# Altium PCB ИТКС.687281.099.PcbDoc
Units mm, origin at the board's own origin, x right, y up, seen from the top; angles counter-clockwise.
Board outline 107.3 x 127.2 mm, 2 copper layers (Top Layer, Bottom Layer); 70 components, 63 nets, 341 pads, 55 vias.
Unrouted connection lines stored in the file: 13.
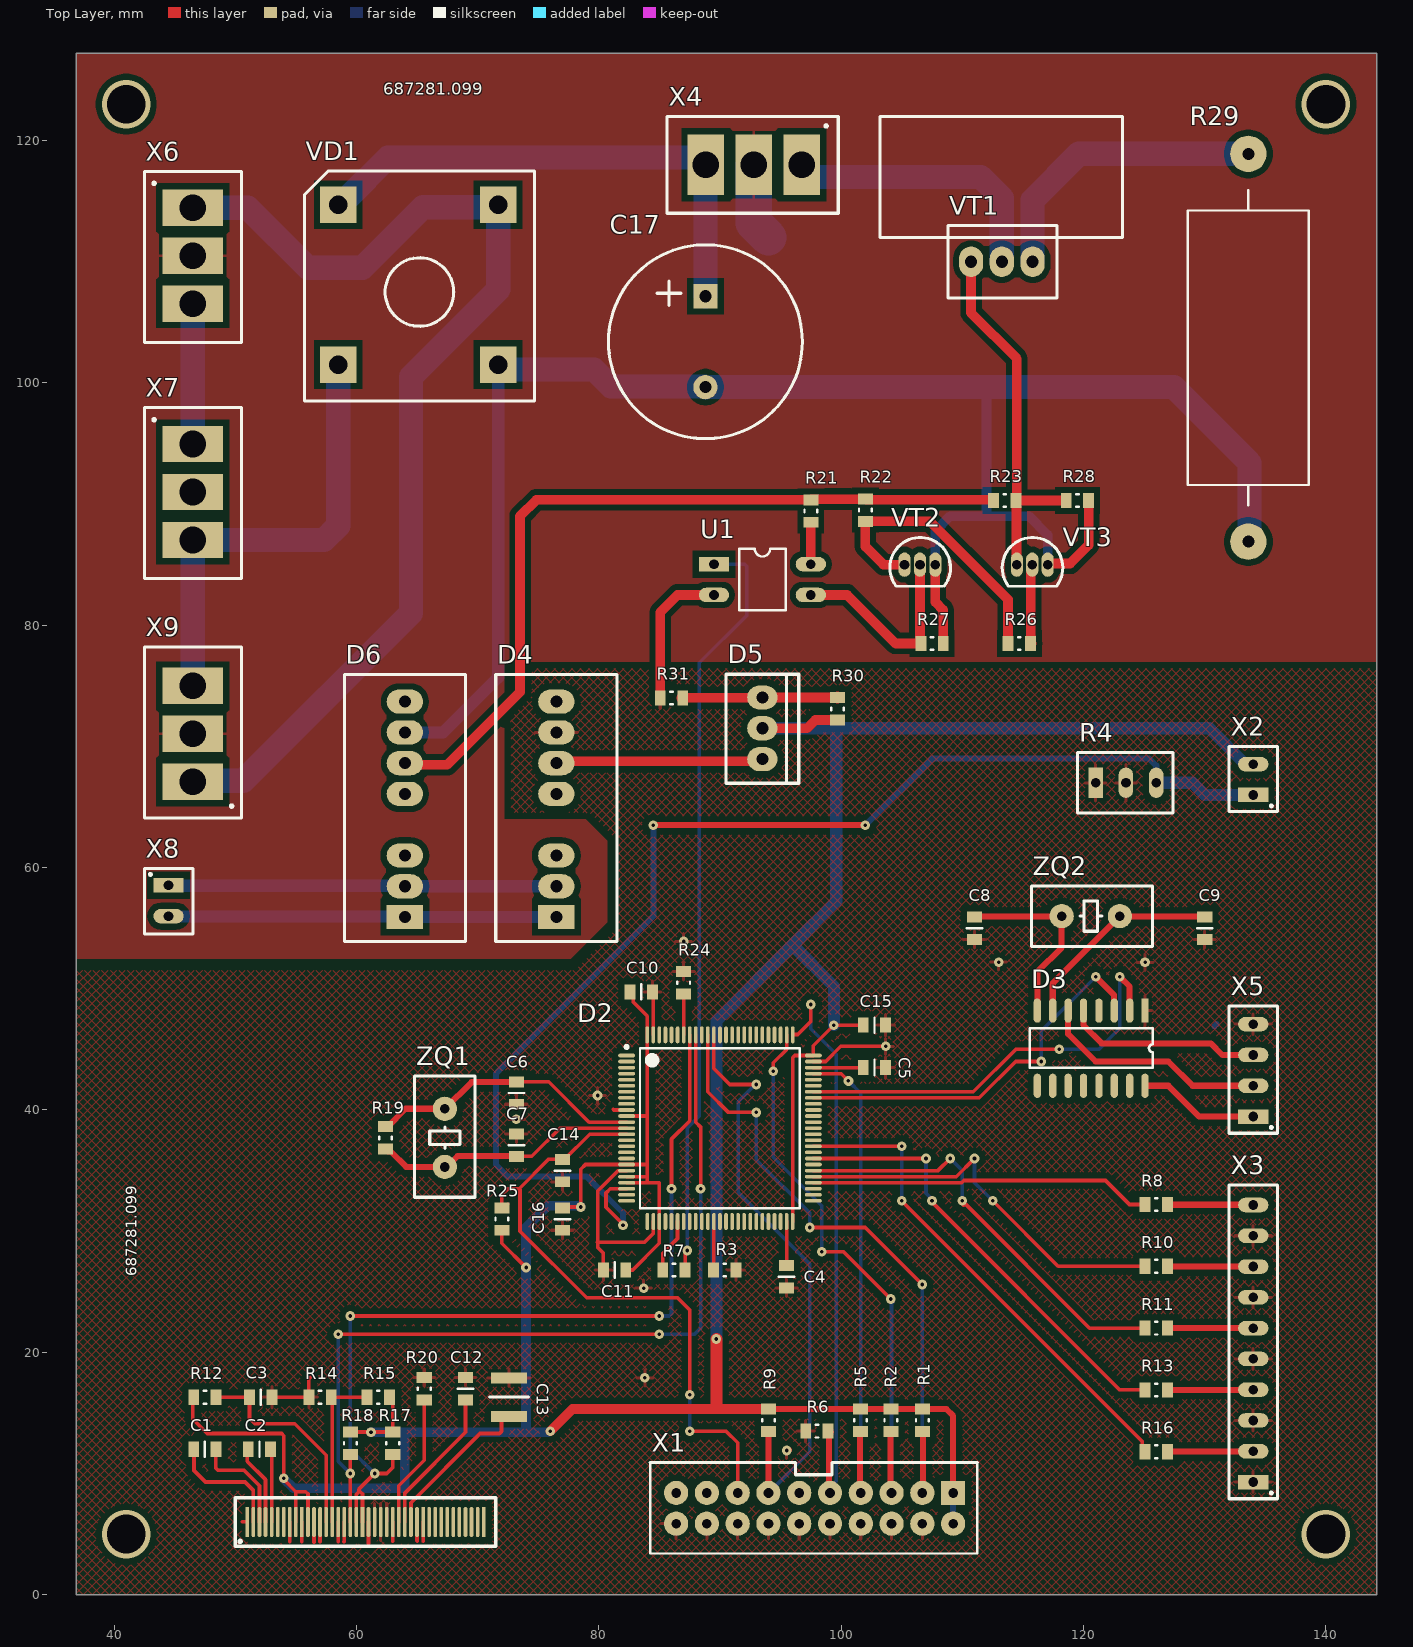
[diagram p0: Top Layer view]
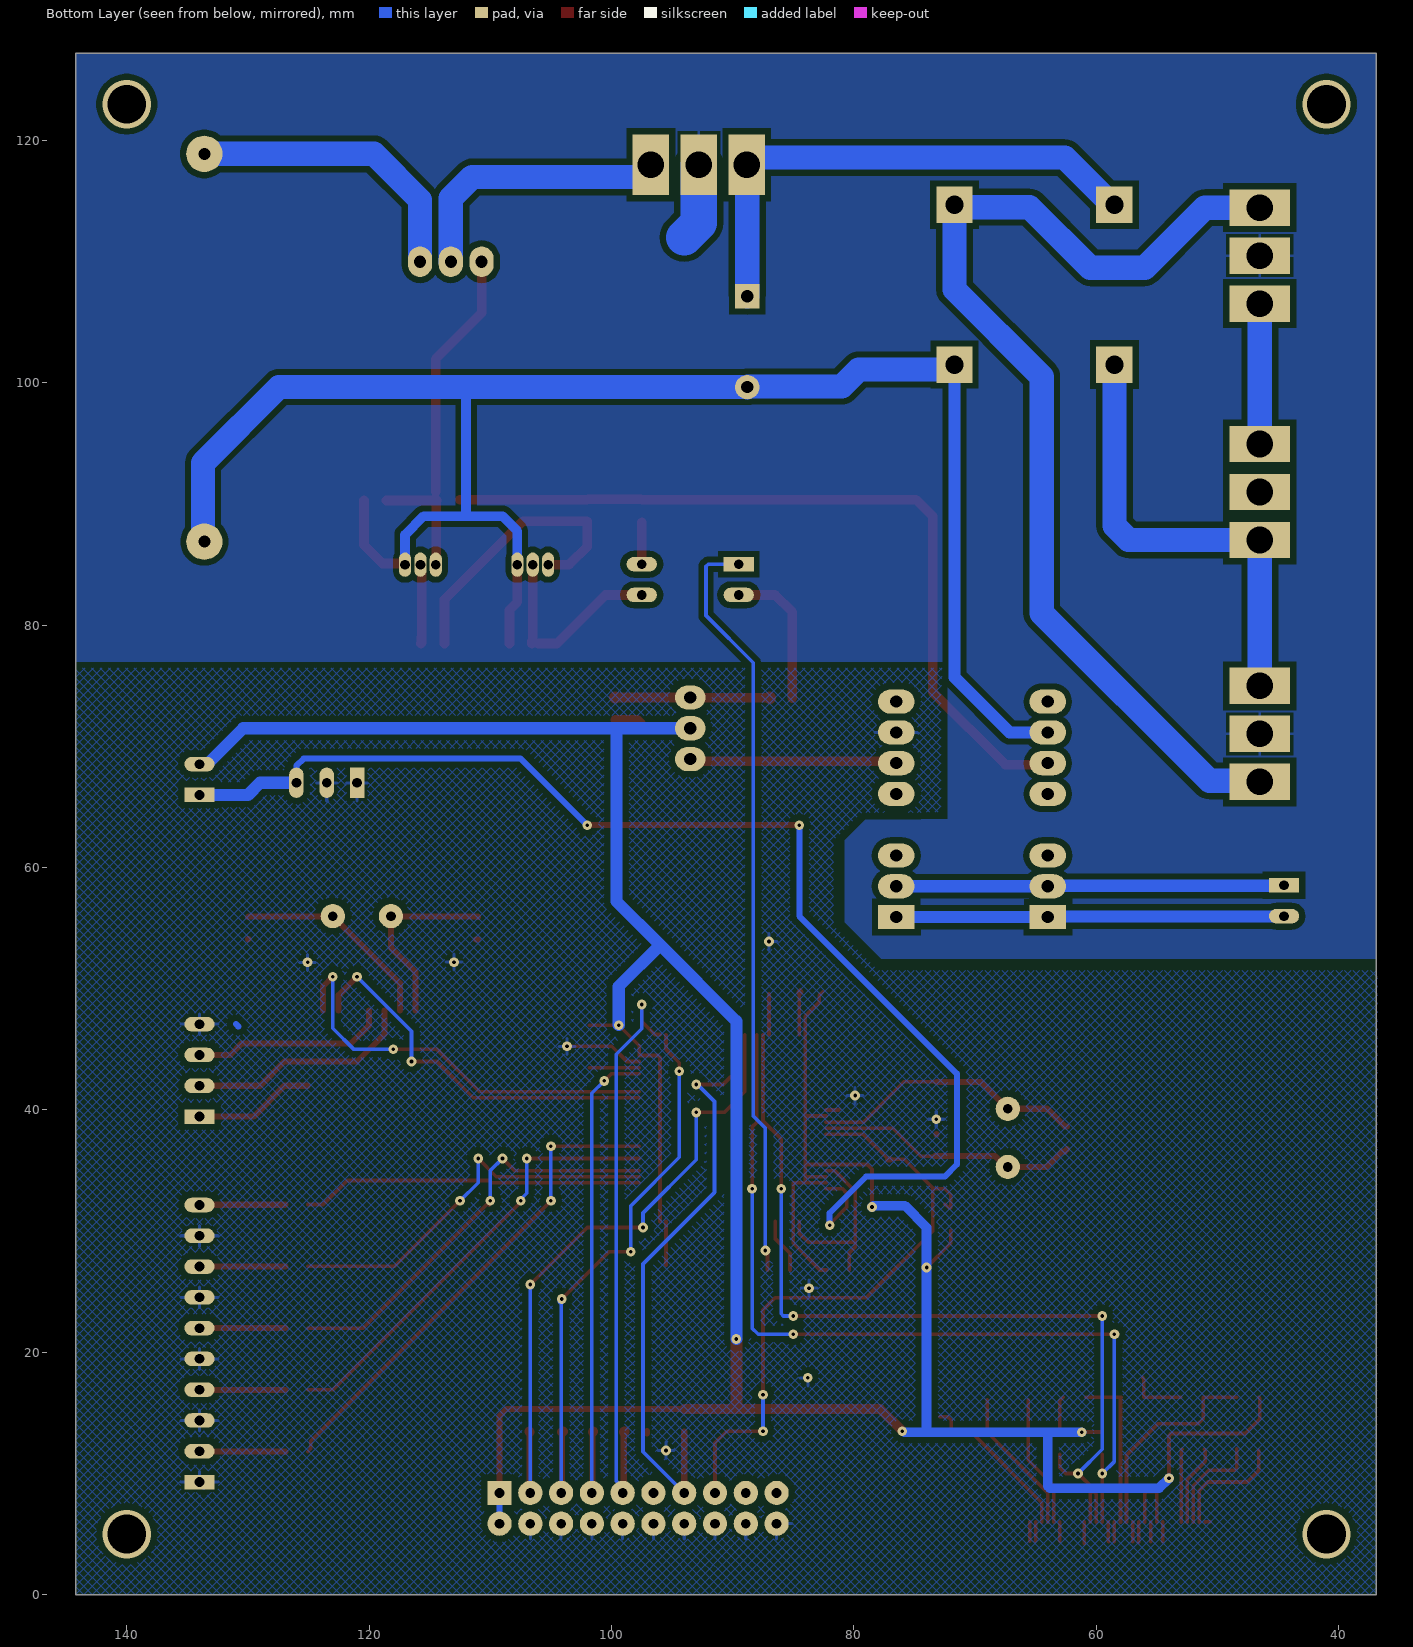
[diagram p1: Bottom Layer view, seen from below]

## Layer stack, top to bottom
Top Solder: solder mask 0.0102, Solder Resist, Dk 3.5
Top Layer: signal copper 0.0356
Dielectric 1: dielectric 0.32, FR-4, Dk 4.8
Bottom Layer: signal copper 0.0356
Bottom Solder: solder mask 0.0102, Solder Resist, Dk 3.5

## Board outline
36.9,0 36.9,127.2 144.2,127.2 144.2,0

## Design rules (kind name [scope] priority, off if disabled: settings)
Clearance [All] p1: gap=0.1 ignorepadtopadclearanceinfootprint=FALSE except(0.5: Arc-Fill Arc-Poly Arc-Region Track-Fill Track-Poly Track-Region SMDPad-Fill SMDPad-Poly SMDPad-Region THPad-Fill THPad-Poly THPad-Region Via-Fill Via-Poly Via-Region Fill-Fill Fill-Poly Fill-Region Poly-Poly Poly-Region Region-Region)
PolygonConnect [All] p1: connectstyle=Relief reliefconductorwidth=0.254 reliefentries=4 polygonreliefangle="90 Angle" airgapwidth=0.254
RoutingVias [All] p1: holewidth=0.711 width=1.27 viastyle="Through Hole" minholewidth=0.1 minwidth=0.1 maxholewidth=5 maxwidth=5
SolderMaskExpansion [All] p1: expansion=0.3 istentingtop=FALSE soldermaskfromhole=TRUE
Width [All] p1: maxlimit=3 minlimit=0.3 preferedwidth=0.5
30 further rules are at their usual default settings.

## Components (designator, comment, footprint, x,y, rotation, side; value= is the part's Value field where it differs from the comment)
C1 "0.1мкф" "C 0805" 47.5,12 r180 top
C2 "0.1мкф" "C 0805" 52,12 r180 top
C3 "0.1мкф" "C 0805" 52.1,16.3 r0 top
C4 "0.1мкф" "C 0805" 95.5,26.25 r270 top
C5 "0.1мкф" "C 0805" 102.75,43.5 r0 top
C6 "22пФ" "C 0805" 73.2,41.4 r90 top
C7 "22пФ" "C 0805" 73.2,37.1 r270 top
C8 "22пФ" "C 0805" 111,55 r270 top
C9 "22пФ" "C 0805" 130,55 r270 top
C10 "0.1мкф" "C 0805" 83.5,49.75 r0 top
C11 "0.1мкф" "C 0805" 81.3,26.8 r180 top
C12 "4.7мкф" "C 0805" 69,17 r270 top
C13 "2.2мкф" "C 1210" 72.588,17.9 r270 top
C14 "0.1мкф" "C 0805" 77,35 r270 top
C15 "0.1мкф" "C 0805" 102.75,47 r180 top
C16 "0.1мкф" "C 0805" 77,31 r90 top
C17 "100мкф" KSE-100 88.8,103.4 r270 top (schematic designator C1)
D1 "SSD1306 OLED" 50A-40BX 51,6 r0 top
D2 "0" "LQFP - 100" 90,38.5 r0 top
D3 "CH340G" SO16 125.08,48.2 r270 top
D4 "TMR 3-2423WI" "TMR 3WI Series" 76.5,55.92 r180 top
D5 "LM317" TO-220 93.5,68.96 r180 top
D6 "TMR 3-2423WI" "TMR 3WI Series" 64,55.92 r180 top
R1 "10к" "R 0805" 106.7,14.4 r270 top
R2 "10к" "R 0805" 104.1,14.4 r270 top
R3 "10к" "R 0805" 90.4,26.8 r0 top
R4 "20к" JBR-3266W 121,67 r90 top
R5 "10к" "R 0805" 101.6,14.4 r270 top
R6 "10к" "R 0805" 98,13.5 r0 top
R7 "360" "R 0805" 86.2,26.8 r0 top
R8 "10" "R 0805" 126,32.2 r0 top
R9 "10к" "R 0805" 94,14.4 r270 top
R10 "10" "R 0805" 126,27.1 r0 top
R11 "10" "R 0805" 126,22 r0 top
R12 "4.7к" "R 0805" 47.5,16.3 r180 top
R13 "10" "R 0805" 126,16.9 r0 top
R14 "100" "R 0805" 57,16.3 r0 top
R15 "10" "R 0805" 61.8,16.3 r0 top
R16 "10" "R 0805" 126,11.8 r0 top
R17 "4.7к" "R 0805" 63,12.5 r270 top
R18 "4.7к" "R 0805" 59.5,12.5 r270 top
R19 "1М" "R 0805" 62.4,37.7 r90 top
R20 "430к" "R 0805" 65.6,17 r270 top
R21 "36к" "R 0805" 97.5,89.425 r90 top
R22 "14к" "R 0805" 102,89.5 r90 top
R23 "14к" "R 0805" 113.5,90.3 r180 top
R24 "10к" "R 0805" 87,50.5 r270 top
R25 "10к" "R 0805" 72,31 r90 top
R26 "20к" "R 0805" 114.7,78.5 r180 top
R27 "20к" "R 0805" 107.5,78.5 r180 top
R28 "14к" "R 0805" 119.5,90.3 r180 top
R29 "1.2" RX27-1 133.6,86.9 r90 top
R30 "100" "R 0805" 99.7,73.1 r270 top
R31 "150" "R 0805" 86,74 r0 top
U1 "SFH618A-4X" DIP4 89.5,85.04 r0 top
VD1 "0" BR-10 71.7,101.5 r180 top
VT1 "2SK3569" TO-220 115.8,110 r270 top
VT2 "BC548A" TO-92 107.77,85 r270 top
VT3 "BC548A" TO-92 117.04,85 r270 top
X1 "JTAG/SWD" "BH-20R (DS1013-20R) (IDC-20MR)" 109.24,8.4 r270 top
X2 "B57045-K 103-K" PLS-2 134,66 r180 top
X3 "Кнопки" PLS-10 134,9.3 r180 top
X4 "Термо-нагрузка" 1-1123723-3 173.245,121.947 r270 top
X5 "USB" PLS-4 134,39.46 r180 top
X6 "Сеть 220В" 1-1123723-3 42.553,190.945 r0 top
X7 "Макс 2А" 1-1123723-3 42.553,171.445 r0 top
X8 "AC/DC: B2L050ESB" PLS-2 44.5,58.54 r0 top
X9 "AC/DC: B2L050ESB" 1-1123723-3 50.447,-9.405 r180 top
ZQ1 "8.000Мгц" HC-49S 67.3,35.3 r90 top
ZQ2 "12.000Мгц" HC-49S 118.2,56 r0 top

## Footprints (in the part's own frame and the unit in brackets; to place one, negate y for a bottom-side part, rotate by r counter-clockwise, add the part's x,y. Pads: shape width x height; smd on the part's side, far side on the other; paste and mask are expansions set on the pad)
1-1123723-3 [mm]
  rect 5x3 hole 2.2: 1(3.947,-76.485) 2(3.947,-80.445) 3(3.947,-84.405)
  silkscreen extent -0.05,-87.6 7.95,-73.49
50A-40BX [mm] "X"
  rect 0.3x2.5 smd: 1(0,0) 10(4.5,0) 20(9.5,0) 30(14.5,0) 40(19.5,0)
  oval 0.3x2.5 smd: 2(0.5,0) 3(1,0) 4(1.5,0) 5(2,0) 6(2.5,0) 7(3,0) 8(3.5,0) 9(4,0) 11(5,0) 12(5.5,0) 13(6,0) 14(6.5,0) 15(7,0) 16(7.5,0) 17(8,0) 18(8.5,0) 19(9,0) 21(10,0) 22(10.5,0) 23(11,0) 24(11.5,0) 25(12,0) 26(12.5,0) 27(13,0) 28(13.5,0) 29(14,0) 31(15,0) 32(15.5,0) 33(16,0) 34(16.5,0) 35(17,0) 36(17.5,0) 37(18,0) 38(18.5,0) 39(19,0)
  silkscreen extent -1,-2 20.5,2
"BH-20R (DS1013-20R) (IDC-20MR)" [mm] "X"
  rect 2x2 hole 0.8: 1(0,0)
  round 2 hole 0.8: 2(2.54,0) 3(0,-2.54) 4(2.54,-2.54) 5(0,-5.08) 6(2.54,-5.08) 7(0,-7.62) 8(2.54,-7.62) 9(0,-10.16) 10(2.54,-10.16) 11(0,-12.7) 12(2.54,-12.7) 13(0,-15.24) 14(2.54,-15.24) 15(0,-17.78) 16(2.54,-17.78) 17(0,-20.32) 18(2.54,-20.32) 19(0,-22.86) 20(2.54,-22.86)
  silkscreen extent -2.5,-25 5,2
BR-10 [mm]
  rect 3x3 hole 1.5: AC1(0,-13.2) AC2(13.2,0) U+(13.2,-13.2) U-(0,0)
  silkscreen extent -3,-16 16,3
"C 0805" [mm] "C"
  rect 0.9x1.25 smd: 1(-0.925,0) 2(0.925,0)
  silkscreen extent 0,-0.64 0,0.64
"C 1210" [mm] "C"
  rect 0.9x3 smd: 1(0,0) 2(3.2,0)
  silkscreen extent 1.6,-1.6 1.6,1.6
DIP4 [mm]
  rect 2.5x1.2 hole 0.8: 1(0,0)
  oval 2.5x1.2 hole 0.8: 2(0,-2.54) 3(8,-2.54) 4(8,0)
  silkscreen extent 2.08,-3.81 5.91,1.27
HC-49S [mm] "BQ"
  round 2 hole 0.8: 1(0,0) 2(4.8,0)
  silkscreen extent -2.5,-2.5 7.5,2.5
JBR-3266W [mm]
  rect 2.5x1.2 hole 0.8: 1(0,0)
  oval 2.5x1.2 hole 0.8: 2(0,-5) 3(0,-2.5)
  silkscreen extent -2.5,-6.4 2.5,1.5
KSE-100 [mm]
  rect 2x2 hole 1: 1(-3.75,0)
  round 2 hole 1: 2(3.75,0)
  silkscreen extent -8,-8 8,8
"LQFP - 100" [mm] "LQFP - 100"
  oval 1.4x0.3 smd: 1(-7.7,6) 2(-7.7,5.5) 3(-7.7,5) 4(-7.7,4.5) 5(-7.7,4) 6(-7.7,3.5) 7(-7.7,3) 8(-7.7,2.5) 9(-7.7,2) 10(-7.7,1.5) 11(-7.7,1) 12(-7.7,0.5) 13(-7.7,0) 14(-7.7,-0.5) 15(-7.7,-1) 16(-7.7,-1.5) 17(-7.7,-2) 18(-7.7,-2.5) 19(-7.7,-3) 20(-7.7,-3.5) 21(-7.7,-4) 22(-7.7,-4.5) 23(-7.7,-5) 24(-7.7,-5.5) 25(-7.7,-6) 51(7.7,-6) 52(7.7,-5.5) 53(7.7,-5) 54(7.7,-4.5) 55(7.7,-4) 56(7.7,-3.5) 57(7.7,-3) 58(7.7,-2.5) 59(7.7,-2) 60(7.7,-1.5) 61(7.7,-1) 62(7.7,-0.5) 63(7.7,0) 64(7.7,0.5) 65(7.7,1) 66(7.7,1.5) 67(7.7,2) 68(7.7,2.5) 69(7.7,3) 70(7.7,3.5) 71(7.7,4) 72(7.7,4.5) 73(7.7,5) 74(7.7,5.5) 75(7.7,6)
  oval 0.3x1.4 smd: 26(-6,-7.7) 27(-5.5,-7.7) 28(-5,-7.7) 29(-4.5,-7.7) 30(-4,-7.7) 31(-3.5,-7.7) 32(-3,-7.7) 33(-2.5,-7.7) 34(-2,-7.7) 35(-1.5,-7.7) 36(-1,-7.7) 37(-0.5,-7.7) 38(0,-7.7) 39(0.5,-7.7) 40(1,-7.7) 41(1.5,-7.7) 42(2,-7.7) 43(2.5,-7.7) 44(3,-7.7) 45(3.5,-7.7) 46(4,-7.7) 47(4.5,-7.7) 48(5,-7.7) 49(5.5,-7.7) 50(6,-7.7) 76(6,7.7) 77(5.5,7.7) 78(5,7.7) 79(4.5,7.7) 80(4,7.7) 81(3.5,7.7) 82(3,7.7) 83(2.5,7.7) 84(2,7.7) 85(1.5,7.7) 86(1,7.7) 87(0.5,7.7) 88(0,7.7) 89(-0.5,7.7) 90(-1,7.7) 91(-1.5,7.7) 92(-2,7.7) 93(-2.5,7.7) 94(-3,7.7) 95(-3.5,7.7) 96(-4,7.7) 97(-4.5,7.7) 98(-5,7.7) 99(-5.5,7.7) 100(-6,7.7)
  silkscreen extent -7.82,-6.6 6.6,6.82
PLS-2 [mm] "X"
  rect 2.5x1.2 hole 0.8: 1(0,0)
  oval 2.5x1.2 hole 0.8: 2(0,-2.54)
  silkscreen extent -2,-4 2,1.38
PLS-4 [mm] "X"
  rect 2.5x1.2 hole 0.8: 1(0,0)
  oval 2.5x1.2 hole 0.8: 2(0,-2.54) 3(0,-5.08) 4(0,-7.62)
  silkscreen extent -2,-9.12 2,1.38
PLS-10 [mm] "X"
  rect 2.5x1.2 hole 0.8: 1(0,0)
  oval 2.5x1.2 hole 0.8: 2(0,-2.54) 3(0,-5.08) 4(0,-7.62) 5(0,-10.16) 6(0,-12.7) 7(0,-15.24) 8(0,-17.78) 9(0,-20.32) 10(0,-22.86)
  silkscreen extent -2,-24.5 2,1.38
"R 0805" [mm] "R"
  rect 0.9x1.25 smd: 1(-0.925,0) 2(0.925,0)
  silkscreen extent -0.1,-0.53 0.1,0.53
RX27-1 [mm]
  round 3 hole 1: 1(0,0) 2(32,0)
  silkscreen extent 3,-5 29,5
SO16 [mm] "D"
  rect 2x0.6 smd: 1(0,0)
  oval 2x0.6 smd: 2(0,-1.27) 3(0,-2.54) 4(0,-3.81) 5(0,-5.08) 6(0,-6.35) 7(0,-7.62) 8(0,-8.89) 9(6.2,-8.89) 10(6.2,-7.62) 11(6.2,-6.35) 12(6.2,-5.08) 13(6.2,-3.81) 14(6.2,-2.54) 15(6.2,-1.27) 16(6.2,0)
  silkscreen extent 1.47,-9.53 4.73,0.64
"TMR 3WI Series" [mm] "D"
  rect 3x2 hole 1: 1(0,0)
  oval 3x2 hole 1: 2(0,-2.54) 3(0,-5.08) 5(0,-10.16) 6(0,-12.7) 7(0,-15.24) 8(0,-17.78)
  silkscreen extent -5,-20 5,2
TO-92 [mm] "VT"
  oval 2x1 hole 0.8: B(0,-1.27) E(0,0) K(0,-2.54)
  silkscreen extent -2.25,-3.75 1.78,1.25
TO-220 [mm]
  oval 2.5x2 hole 1: 1(0,-5.08) 2(0,-2.54) 3(0,0)
  silkscreen extent -3,-7 3,2

## Part data
C1 C2 C3 C4 C5 C10 C11 C14 C15 C16: library part "GRM21BR71H 104", "0.1 мкФ X7R 50В 10% 0805, GRM21BR71H104KA01L"
C6 C7 C8 C9: library part "GRM21A5C2E 220", "22пФ C0G 250B 5% 0805, GRM21A5C2E220J"
C12: library part "GRM21BR61A 475", "GRM21BR61A475KA73L, (чип 0805 X5R 4.7uF +10% 10V), Керамический ЧИП-конденсатор 0805 X5R 4.7мкФ +10%"
C13: library part "GRM32ER72A 225", "2.2 мкФ X7R 10% 100В 1210, GRM32ER72A225K"
C17: library part KSE-100UF-400V-1830-105, "Конденсатор электролитический KSE-100UF-400V-1830-105"
D2: library part STM32F407VE6, "STM32F407VE6, Cortex-M3, 512k"
D3: "CH340G, Преобразователь интерфейса USB в UART [SOP-16]"
D5: "LM317, Стабилизатор напряжения, линейный,регулируемый, 1,5А, TO220"
R1 R2 R3 R5 R6 R9 R24 R25: library part "RT0805BRD07 10K", "0.125Вт 0805 10 кОм, 0п.1%, RT0805BRD0710KL"
R4: library part "JBR-3266W 203", "JBR-3266W-203-R, 20 кОм, Резистор подстроечный"
R7: library part "RC0805FR-07 360R", "RC0805FR-07360RL, (чип 0805 360 1%), Толстопленочный ЧИП-резистор 0805 360Ом +1% 0.125Вт"
R8 R10 R11 R13 R15 R16: library part "RC0805FR-07 10R", "0.125Вт 0805 10 Ом, 1%, RC0805FR-0710RL"
R12 R17 R18: library part "RC0805FR07 4K7", "0.125Вт 0805 4.7 кОм, 1%, RC0805FR-074K7L"
R14 R30: library part "RC0805FR-07 100R", "0.125Вт 0805 100 Ом, 1%, RC0805FR-07100RL"
R19: library part "RC0805FR-07 1M", "0.125Вт 0805 1 МОм, 1%, RC0805FR-071ML"
R20: library part "RC0805JR-07 430K", "0.125Вт 0805 430 кОм, 5%, RC0805JR-07430KL"
R21: library part "RC0805FR-07 36K", "RC0805FR-0736KL, (чип 0805 36.0К 1%), Толстопленочный ЧИП-резистор 0805 36кОм"
R22 R23 R28: library part "RC0805FR-07 14K", "14 кОм 0805 1% RC0805FR-0714K"
R26 R27: library part "RC0805FR-07 20K", "0.125Вт 0805 20 кОм, 1%, RC0805FR-0720KL"
R29: library part "RX27-1 1.2R", "RX27-1 1.2 Ом 5W 5% / SQP5, Мощный постоянный резистор , керамо-цементный корпус"
R31: library part "RC0805FR-07 150R", "RC0805FR-07150RL, (чип 0805 150 1%), Толстопленочный ЧИП-резистор 0805 150Ом +1% 0.125Вт"
U1: "SFH618A-4X, Оптопара транзисторная [DIP-4]"
VD1: library part BR1001, "BR1001, Диодный мост однофазный 10А 100В [BR-10.] (=KBPC1001, BR101)"
VT1: "2SK3569, Транзистор, TT-MOSVI, N-канал, 600В, 10А"
VT2 VT3: "BC548A, Транзистор NPN 30В 0.1А"
X1: library part BH-20R, "BH-20R (DS1013-20R) (IDC-20MR), Вилка на плату угловая 20pin 2.54мм"
X2 X8: library part PLS-2, "PLS-2 (DS-1021-1x2), Вилка штыревая 2.54мм 1x2pin прямая тип1"
X3: library part PLS-10, "PLS-10(DS-1021-1x10), Вилка штыревая 2.54мм 1x10pin прямая тип1"
X4 X6 X7 X9: library part 1-1123723-3, "1-1123723-3 (B3P-VH), Разъем 3 pin шаг 3.96мм"
X5: library part PLS-4, "PLS-4 (DS-1021-1x4), Вилка штыревая 2.54мм 1x4pin прямая тип1"
ZQ1: library part "HC-49S 8M", "8.000Мгц, HC-49S, Кварцевый резонатор"
ZQ2: library part "HC-49S 12M", "12.000Мгц, HC-49S, Кварцевый резонатор"

## Via types
v1: diameter 0.8, hole 0.3, Top Layer to Bottom Layer, 51 vias
v2: diameter 4, hole 3.2, Top Layer to Bottom Layer, 4 vias

## Nets (pads, with @x,y where several pads share a name; then routed paths per layer and width w, separated by ;. In a path a pad name is that pad's centre, name@x,y a point inside that pad or via, vN(x,y) a via of type N, cw(c..) or ccw(c..) an arc to the next point about the centre after c; other vN are vias at no path point)
3.3В: C10.1 C11.1 C15.2 C16.2 D1.9 D1.11 D2.11 D2.19 D2.21 D2.22 D2.28 D2.50 D2.75 D2.100 D5.2 R1.1 R2.1 R5.1 R9.1 R12.2 R15.2 R17.1 R18.1 R25.1 R30.2 X1.1 X1.2 X2.2 | length 304.9
  Top Layer w0.3: R12.2 46.5,16.225 46.5,14.5 47.7,13.3 53.824,13.3 54,13.124 v1(54,9.6) v1@54,9.53 ; v1@54,9.5 55,8.5 55.824,8.5 56,8.324 D1.11 ; D1.9 55,8.47 ; R18.1 R17.1 63,16.025 R15.2 ; R25.1 72,29 v1(74,27) ; C16.2 77.075,32 v1(78.5,32) 78.5,35.1 78.9,35.5 D2.19 84,35.5 ; C11.1 82.8,26.8 85,29 D2.28 85,34 84,34 ; D2.22 84,34 ; D2.21 84,34.5 ; D2.11 84,39.5 ; C10.1 82.843,49.482 82.843,48.907 84,47.75 D2.100 84,39.5 ; D2.50 96,44.324 96.176,44.5 D2.75 97.7,45.3 v1(99.4,47) C15.2 ; 84,34 84,34.5 ; 84,34.5 84,35.5 ; 84,35.5 84,39.5
  Top Layer w0.5: R9.1 R5.1 R2.1 R1.1 108.675,15.325 109.24,14.76 X1.1
  Top Layer w0.8: v1(76,13.5) 77.825,15.325 R9.1 ; D5.2 97.2,71.5 97.875,72.175 R30.2
  Top Layer w1: 89.7,15.425 v1(89.7,21.1)
  Bottom Layer w0.5: v1@75.819,13.4 75.919,13.5 v1(76,13.5) ; X1.2 X1.1 ; X2.2@133.35,68.54 X2.2
  Bottom Layer w0.8: v1(54,9.6) 54.807,8.793 63.817,8.793 63.993,8.969 63.993,13.4 ; v1(61.2,13.4) 63.993,13.4 ; v1@75.819,13.4 74,13.4 ; v1(78.5,32) 78.4,32.1 75.8,32.1 74,30.3 74,13.4 ; 63.993,13.4 74,13.4
  Bottom Layer w1: v1(89.7,21.1) 89.7,47.322 95.989,53.611 ; D5.2 99.6,71.5 ; v1(99.4,47) 99.4,50.2 95.989,53.611 ; X2.2@133.35,68.54 130.39,71.5 99.6,71.5 ; 95.989,53.611 99.6,57.222 99.6,71.5
+310В: C17.1 VD1.U+ X4.3 | length 43.1
  Bottom Layer w2: VD1.U+@58.516,114.716 59,115.2 59.2,115.2 62.6,118.6 88.34,118.6 88.84,118.1 X4.3 ; C17.1 X4.3@88.8,117.96
GND: C3.2 C4.2 C5.2 C6.1 C7.1 C8.2 C9.2 C10.2 C11.2 C12.1 C13.1 C14.2 C15.1 C16.1 D1.1 D1.8 D1.10 D1.12 D1.13 D1.16 D1.17 D1.21 D1.22 D1.23 D1.24 D1.25 D1.29 D1.30 D2.10 D2.20 D2.27 D2.74 D2.99 D3.1 D4.7 R3.2 R4.1 R4.3 R6.1 R14.1 R20.1 R24.1 R31.1 U1.2 X1.4 X1.6 X1.8 X1.10 X1.12 X1.14 X1.16 X1.18 X1.20 X3.1 X3.3 X3.5 X3.7 X3.9 X5.4 | length 62.9
  Top Layer w0.3: 50.6,6.025 51,6.025 D1.1 ; C3.2 R14.1 56.075,17.825 56.175,17.925 ; 54.5,4.375 D1.8 ; 55.5,4.375 D1.10 ; D1.12 56.5,4.35 56.525,4.325 ; 57,4.375 D1.13 ; 58.5,4.375 58.5,4.425 D1.16 ; 58.975,4.375 59,4.4 D1.17 ; 61,4.2 D1.21 ; 63,4.4 D1.25 ; D1.29 65,4.45 65.025,4.425 ; 65.5,4.425 D1.30 ; 79.875,29.075 79.9,29.075 ; C11.2 80.375,28.2 79.9,28.675 79.9,29.075 ; 81.2,40.05 81.25,40 D2.10 ; D2.20 81.6,35 79.9,33.3 79.9,29.075 ; C10.2 C10.2@84.425,49.925 ; D2.27 84.5,29.8 83.775,29.075 79.9,29.075 ; D2.99 84.5,47.225 C10.2@84.5,49.675 ; D2.74 98.725,44 99.975,45.25 v1(103.675,45.25)
  Top Layer w0.5: C7.1@73.2,38 C7.1 ; C10.2 C10.2@84.5,49.675 ; v1(95.5,11.9) 95.557,11.957 v1@95.707,11.957 ; R6.1@97.075,13.325 R6.1 ; C8.2 C8.2@111.175,54.075 ; v1(113,52.2) v1@113,52.25 ; C9.2@129.975,54.1 C9.2
  Top Layer w0.8: R31.1 85.075,81.075 86.5,82.5 U1.2
  Bottom Layer w0.5: v1@83.7,18 v1(83.8,17.9) ; X1.20@86.345,5.895 X1.20 ; X1.4 X1.4@106.987,5.573 ; v1(113,52.2) v1@113.01,52.19 ; v1@125.07,52.19 v1(125.08,52.18) ; 130.8,46.9 130.98,47.08 ; X3.1@133.65,8.95 X3.1
  Bottom Layer w0.8: X1.4@106.93,5.516 X1.4@106.987,5.573
  other v1: 83.7,25.3 73.2,39.238 79.9,41.2 87,53.9
GND_310: C17.2 D6.7 R27.1 R28.1 R29.1 VD1.U- VT2.E VT3.E | length 148.1
  Top Layer w0.8: VT2.E 107.77,81.913 108.425,81.258 R27.1 ; VT3.E 117.04,85.008 117.132,85.1 118.9,85.1 120.425,86.625 R28.1
  Bottom Layer w0.8: VT2.E 107.77,87.77 109,89 112,89 ; 111.9,99.662 112,99.562 112,89 ; VT3.E 117.04,87.46 115.5,89 112,89
  Bottom Layer w1: D6.7 67.16,71.16 71.7,75.7 VD1.U-
  Bottom Layer w2: VD1.U- 72.1,101.1 79.6,101.1 81,99.7 88.75,99.7 C17.2 88.812,99.662 111.9,99.662 127.438,99.662 133.7,93.4 133.7,87 R29.1
GND_set: X4.2 X6.2 X9.2 | length 6.5
  Bottom Layer w3: X4.2 92.8,113.2 94,112
NetC1_1: C1.1 D1.3 | length 8.8
  Top Layer w0.3: C1.1@48.4,12.036 48.4,10.451 48.576,10.275 50.725,10.275 52,9 D1.3
NetC1_2: C1.2 D1.2 | length 9.9
  Top Layer w0.3: C1.2@46.6,11.916 46.6,10.244 47.544,9.3 50.8,9.3 51.5,8.6 D1.2
NetC2_1: C2.1 D1.5 | length 6
  Top Layer w0.3: C2.1 53,11.925 D1.5
NetC2_2: C2.2 D1.4 | length 6.7
  Top Layer w0.3: C2.2 51,11.925 51,11 52.5,9.5 D1.4
NetC3_1: C3.1 D1.14 R12.1 | length 17.5
  Top Layer w0.3: R12.1 C3.1@51.075,16.3 ; C3.1 51.175,14.525 51.6,14.1 54.9,14.1 57.5,11.5 D1.14
NetC4_1: C4.1 D2.49 | length 3.6
  Top Layer w0.3: C4.1 D2.49
NetC5_1: C5.1 D2.73 | length 4.1
  Top Layer w0.3: D2.73 C5.1
NetC6_2: C6.2 D2.12 R19.2 ZQ1.2 | length 22.8
  Top Layer w0.3: C6.2 75.875,42.325 79.2,39 D2.12
  Top Layer w0.5: R19.2 62.575,38.625 64.05,40.1 ZQ1.2 69.5,42.3 73.175,42.3 C6.2
NetC7_2: C7.2 D2.13 R19.1 ZQ1.1 | length 21.8
  Top Layer w0.3: C7.2@73.3,36.175 73.475,36.175 74.475,36.175 76.8,38.5 D2.13
  Top Layer w0.5: R19.1 62.6,36.575 62.825,36.575 64.1,35.3 67.443,35.3 68.343,36.2 C7.2@73.3,36.2
NetC8_1: C8.1 D3.8 ZQ2.1 | length 15.9
  Top Layer w0.5: C8.1 111.037,55.962 118.162,55.962 ZQ2.1 118.2,53.4 116.19,51.39 D3.8
NetC9_1: C9.1 D3.7 ZQ2.2 | length 17.1
  Top Layer w0.5: D3.7 117.46,50.46 ZQ2.2 123.038,55.962 129.962,55.962 C9.1
NetC12_2: C12.2 D1.27 | length 12.1
  Top Layer w0.3: D1.27 64,8.4 69,13.4 C12.2
NetC13_2: C13.2 D1.28 | length 13.5
  Top Layer w0.3: D1.28 64.5,7.6 70.2,13.3 71.8,13.3 71.976,13.476 71.976,14.4 72.276,14.7 C13.2@72.9,14.7
NetD1_15: D1.15 R14.2 R15.1 | length 13.3
  Top Layer w0.3: D1.15 58,16.225 R14.2 R15.1
NetD1_26: D1.26 R20.2 | length 10.9
  Top Layer w0.3: D1.26 63.5,9 65.6,11.1 R20.2
NetD2_23: D2.23 R4.2 X2.1 | length 105.5
  Top Layer w0.3: v1@82,30.581 80.6,31.981 80.6,33.157 80.943,33.5 D2.23
  Top Layer w0.5: v1(82,30.5) v1@82,30.581 ; v1(84.5,63.5) v1(102,63.5)
  Bottom Layer w0.5: v1(82,30.5) 82,31.5 79,34.5 72.5,34.5 71.5,35.5 71.5,43 84.5,56 v1(84.5,63.5) ; v1(102,63.5) 107.5,69 125.414,69 126,68.414 R4.2
  Bottom Layer w1: R4.2 129,67 130,66 X2.1
NetD2_31: D2.31 R7.1 | length 4.5
  Top Layer w0.3: R7.1 85.275,28.175 86.5,29.4 D2.31
NetD2_37: D2.37 R3.1 | length 4
  Top Layer w0.3: R3.1 89.5,26.825 D2.37
NetD2_54: D2.54 R8.1 | length 28.3
  Top Layer w0.3: D2.54 109.942,34 110.125,34.183 121.817,34.183 123.8,32.2 R8.1
NetD2_55: D2.55 R10.1 | length 32.9
  Top Layer w0.3: D2.55 109.5,34.5 v1(111,36) ; v1(112.5,32.5) 117.9,27.1 R10.1
  Bottom Layer w0.3: v1(111,36) 111,34 v1(112.5,32.5)
NetD2_56: D2.56 R11.1 | length 35.2
  Top Layer w0.3: D2.56 108,35 v1(109,36) ; v1@110.096,32.154 110.096,32.404 120.5,22 R11.1
  Bottom Layer w0.3: v1(109,36) 110,35 v1(110,32.5)
NetD2_58: D2.58 R13.1 | length 37.2
  Top Layer w0.3: D2.58 v1(107,36) ; v1@107.4,32.5 v1(107.5,32.5) ; v1@107.45,32.45 123,16.9 R13.1
  Bottom Layer w0.3: v1(107,36) 107,33.135 107.5,32.635 v1(107.5,32.5)
NetD2_60: D2.60 R16.1 | length 40.6
  Top Layer w0.3: D2.60 v1(105,37) ; v1@105.126,32.374 124.832,12.668 124.832,12.043 R16.1
  Bottom Layer w0.3: v1(105,32.5) v1(105,37)
NetD2_94: D2.94 R24.2 | length 3.4
  Top Layer w0.3: D2.94 R24.2
NetD3_5: D3.5 X5.3 | length 16.2
  Top Layer w0.5: D3.5 120,47 121.5,45.5 130.5,45.5 131.46,44.54 X5.3
NetD3_6: D3.6 X5.2 | length 19
  Top Layer w0.5: D3.6 118.73,46.27 121,44 127,44 129,42 X5.2
NetD3_16: D3.16 X5.1 | length 10
  Top Layer w0.5: D3.16 127,42 129.54,39.46 X5.1
NetD4_1: D4.1 D6.1 X8.2 | length 32
  Bottom Layer w1: X8.2 44.538,55.962 63.958,55.962 D6.1 D4.1
NetD4_2: D4.2 D6.2 X8.1 | length 32
  Bottom Layer w1: X8.1 44.54,58.5 63.96,58.5 D6.2 D4.2
NetD5_1: D5.1 R30.1 R31.2 | length 12.8
  Top Layer w0.8: R31.2@86.945,74.02 D5.1@93.48,74.02 ; D5.1@93.508,74.032 R30.1@99.693,74.032
  Top Layer w1: R31.2 R31.2@86.945,74.02 ; D5.1@93.48,74.02 D5.1 D5.1@93.508,74.032 ; R30.1@99.693,74.032 R30.1
NetR8_2: R8.2 X3.10 | length 7.1
  Top Layer w0.5: R8.2 126.945,32.18 133.98,32.18 X3.10
NetR10_2: R10.2 X3.8 | length 7.1
  Top Layer w0.5: R10.2 126.935,27.09 133.99,27.09 X3.8
NetR11_2: R11.2 X3.6 | length 7.1
  Top Layer w0.5: R11.2 X3.6
NetR13_2: R13.2 X3.4 | length 7.1
  Top Layer w0.5: R13.2 126.935,16.91 133.99,16.91 X3.4
NetR16_2: R16.2 X3.2 | length 7.1
  Top Layer w0.5: R16.2 126.945,11.82 133.98,11.82 X3.2
NetR21_1: R21.1 U1.4 | length 3.5
  Top Layer w0.8: U1.4 R21.1
NetR22_1: R22.1 R26.2 VT2.K | length 24
  Top Layer w0.8: VT2.K 103.5,85 102,86.5 R22.1 107.325,88.575 113.775,82.125 R26.2
NetR23_1: R23.1 R28.2 VT1.1 VT3.K | length 30
  Top Layer w0.8: VT1.1 110.72,105.78 114.5,102 114.5,91 ; VT3.K 114.462,85.038 114.462,90.262 R23.1 R28.2
NetR26_1: R26.1 VT3.B | length 6.6
  Top Layer w0.8: R26.1@115.725,78.5 115.675,78.55 115.675,79.059 115.654,79.08 115.654,84.33 115.77,84.446 VT3.B
NetR27_2: R27.2 U1.3 VT2.B | length 16.8
  Top Layer w0.8: U1.3 100.5,82.5 104.5,78.5 106.075,78.5 ; VT2.B 106.5,78.75 106.575,78.675 R27.2
NetR29_2: R29.2 VT1.3 | length 24.5
  Bottom Layer w2: VT1.3 115.8,115.1 119.6,118.9 R29.2
NetVD1_AC1: VD1.AC1 X6.1 X9.1 | length 89.6
  Bottom Layer w2: X9.1 46.581,67.161 50.661,67.161 64.5,81 64.5,100.5 71.7,107.7 71.7,114.5 65.5,114.5 60.5,109.5 56,109.5 51.04,114.46 X6.1
NetVD1_AC2: VD1.AC2 X7.3 X9.3 | length 37.8
  Bottom Layer w2: X9.3 X7.3 57.328,87.04 58.5,88.212 VD1.AC2@58.5,101.493
NetVT1_2: VT1.2 X4.1 | length 23.2
  Bottom Layer w2: X4.1 96.76,117.5 97.26,117 111.5,117 113.26,115.24 VT1.2
NetX6_3: X6.3 X7.1 | length 11.6
  Bottom Layer w2: X7.1 X6.3
RST: C14.1 D2.14 R25.2 X1.15 | length 52.8
  Top Layer w0.3: R25.2@72.475,32.225 72.175,31.925 R25.2 72,33 72.5,33.5 73.425,33.5 ; C14.1 75.85,35.925 73.425,33.5 ; C14.1@77.175,35.925 79.25,38 D2.14 ; v1(87.5,13.5) 90.5,13.5 91.46,12.54 X1.15 ; v1(87.5,16.5) 87.5,23.5 86.5,24.5 79,24.5 73.5,30 73.5,33.425 73.425,33.5
  Top Layer w0.5: C14.1 C14.1@77.175,35.925
  Bottom Layer w0.3: v1(87.5,13.5) v1(87.5,16.5)
RxD: D2.68 D3.3 | length 32.3
  Top Layer w0.3: D2.68 111.4,41 114.4,44 v1(116.5,44)
  Top Layer w0.5: v1(121,51) 122.521,49.479 122.521,48.219 D3.3
  Bottom Layer w0.3: v1(116.5,44) 116.5,46.5 v1(121,51)
SCL: D1.18 D2.92 R18.2 | length 72
  Top Layer w0.3: v1@58.5,21.5 v1(84.999,21.499) ; D1.18 59.5,7.1 v1(59.5,10) R18.2 ; D2.92 88,39 88.4,38.6 v1(88.4,33.5)
  Bottom Layer w0.3: v1(58.5,21.5) 58.5,11 v1(59.5,10) ; v1@85,21.5 87.9,21.5 88.4,22 v1(88.4,33.5)
SDA: D1.19 D1.20 D2.93 R17.2 | length 74.3
  Top Layer w0.3: v1(59.5,23) v1(85,23) ; D1.19 60,8.284 60.216,8.5 ; D1.20 60.5,8.324 60.324,8.5 60.216,8.5 ; v1@61.596,10.096 v1(61.5,10) ; R17.2 63,10.5 62.5,10 v1(61.5,10) ; v1(86,33.5) 86,37.6 87.5,39.1 D2.93 ; 60.216,8.5 60.216,8.716 v1(61.5,10)
  Bottom Layer w0.3: v1(59.5,23) 59.5,12 v1(61.5,10) ; v1(85,23) 85.824,23 86,23.176 v1(86,33.5)
TCK: D2.76 R6.2 X1.9 | length 50
  Top Layer w0.3: D2.76 96,46.224 96.424,46.224 97.5,47.3 v1(97.5,48.7)
  Top Layer w0.5: X1.9@98.99,8.4 98.99,8.49 R6.2@98.99,13.425
  Top Layer w0.8: R6.2@98.9,13.475 98.94,13.475 R6.2@98.99,13.425 ; X1.9@98.99,8.49 X1.9
  Bottom Layer w0.3: v1(97.5,48.7) 97.5,46.7 99.6,44.6 99.6,9.38 99.08,8.86 X1.9
TDI: D2.77 R2.2 X1.5 | length 48.3
  Top Layer w0.3: v1(94.4,43.2) 94.4,43.9 95.5,45 D2.77 ; v1(98.4,28.3) 100.2,28.3 v1(104.1,24.4)
  Top Layer w0.5: X1.5@104.08,8.48 R2.2@104.08,13.425
  Top Layer w0.8: R2.2@104,13.475 104.03,13.475 R2.2@104.08,13.425 ; X1.5@104.08,8.48 X1.5
  Bottom Layer w0.3: v1(94.4,43.2) 94.4,36.1 98.4,32.1 v1(98.4,28.3) ; X1.5 v1@104.16,24.16
  Bottom Layer w0.5: v1@104.16,24.16 v1@104.2,24.2
TDO: D2.89 R9.2 X1.13 | length 50.1
  Top Layer w0.3: D2.89 89.5,43.4 90.8,42.1 v1(93,42.1)
  Top Layer w0.5: X1.13 R9.2
  Bottom Layer w0.3: v1(93,42.1) 92.9,42.1 91.5,40.7 91.5,33.2 97.4,27.3 97.4,11.8 X1.13
TMS: D2.72 R5.2 X1.7 | length 42.8
  Top Layer w0.3: D2.72 99.998,43 100.598,42.4 v1(100.6,42.4)
  Top Layer w0.5: X1.7@101.56,8.4 101.56,8.46 R5.2@101.56,13.425
  Top Layer w0.8: R5.2@101.5,13.475 101.51,13.475 R5.2@101.56,13.425 ; X1.7@101.56,8.46 X1.7
  Bottom Layer w0.3: v1(100.6,42.4) 101.62,41.38 X1.7
TRST: D2.90 R1.2 X1.3 | length 54.3
  Top Layer w0.3: D2.90 89,41.5 90.7,39.8 v1(93,39.8) ; v1(97.4,30.3) 102,30.3 v1(106.7,25.6)
  Top Layer w0.5: X1.3@106.75,8.4 106.75,8.45 R1.2@106.75,13.425
  Top Layer w0.8: X1.3 X1.3@106.75,8.45 ; R1.2@106.75,13.425 R1.2@106.8,13.475
  Bottom Layer w0.3: v1(93,39.8) 93,35.9 97.4,31.5 v1(97.4,30.3) ; X1.3 v1@106.7,25.4
  Bottom Layer w0.5: v1@106.6,25.5 v1@106.7,25.4
TxD: D2.69 D3.2 | length 34.9
  Top Layer w0.3: D2.69 110.9,41.5 114.4,45 v1(118,45)
  Top Layer w0.5: v1(123,51) 123.81,50.19 D3.2
  Bottom Layer w0.3: v1(118,45) 121.25,45 123,46.75 v1(123,51)
U15: D4.6 D5.3 | length 17.1
  Top Layer w0.8: D4.6@76.67,68.79 D5.3@93.33,68.79
  Top Layer w1: D4.6 D4.6@76.67,68.79 ; D5.3@93.33,68.79 D5.3
Uпу: D6.6 R21.2 R22.2 R23.2 | length 66.3
  Top Layer w0.5: R21.2 R21.2@97.537,90.387 ; R22.2@101.962,90.387 R22.2 R22.2@102.062,90.362 ; R23.2@112.513,90.362 R23.2
  Top Layer w0.8: D6.6@64.12,68.5 67.5,68.5 73.5,74.5 73.5,89 74.85,90.35 R21.2 ; R21.2@97.537,90.387 R22.2@101.962,90.387 ; R22.2@102.062,90.362 R23.2@112.513,90.362
  Top Layer w1: D6.6 D6.6@64.12,68.5
Uшим: R7.2 U1.1 | length 62.9
  Top Layer w0.3: R7.2 87.125,28.225 v1(87.3,28.4)
  Bottom Layer w0.3: v1(87.3,28.4) 87.3,38.5 88.3,39.5 88.3,76.9 92.2,80.8 92.2,84.864 92.024,85.04 U1.1
pads on no net: D1.6 D1.7 D1.31 D1.32 D1.33 D1.34 D1.35 D1.36 D1.37 D1.38 D1.39 D1.40 D2.1 D2.2 D2.3 D2.4 D2.5 D2.6 D2.7 D2.8 D2.9 D2.15 D2.16 D2.17 D2.18 D2.24 D2.25 D2.26 D2.29 D2.30 D2.32 D2.33 D2.34 D2.35 D2.36 D2.38 D2.39 D2.40 D2.41 D2.42 D2.43 D2.44 D2.45 D2.46 D2.47 D2.48 D2.51 D2.52 D2.53 D2.57 D2.59 D2.61 D2.62 D2.63 D2.64 D2.65 D2.66 D2.67 D2.70 D2.71 D2.78 D2.79 D2.80 D2.81 D2.82 D2.83 D2.84 D2.85 D2.86 D2.87 D2.88 D2.91 D2.95 D2.96 D2.97 D2.98 D3.4 D3.9 D3.10 D3.11 D3.12 D3.13 D3.14 D3.15 D4.3 D4.5 D4.8 D6.3 D6.5 D6.8 X1.11 X1.17 X1.19 X7.2
copper on no net:
  other v2: 41,5 140,5 41,123 140,123

## Polygon pours and split planes (outlines as drawn)
GND on Bottom Layer "GND_L02_P002" (hatched 45Degree grid 0.5 track 0.1, pour order 2): 81.7,62.2 79.4,64.5 72.75,64.5 72.75,76.5 144.2,76.5 144.2,0 36.9,0 36.8,51.5 78.038,51.5 81.7,55.162
GND_set on Bottom Layer "GND_SET_L02_P000" (solid, pour order 0): 72.25,64 79,64 80.75,62.25 80.75,55.5 77.75,52.5 36.9,52.5 36.9,127.2 144.2,127.2 144.2,88.2 144.25,88.15 144.25,77 134,77 84.333,77 72.25,77
GND on Top Layer "GND_L01_P004" (hatched 45Degree grid 0.5 track 0.1, pour order 4): 144.175,76.475 72.725,76.475 72.75,76.45 72.75,64.525 79.325,64.525 81.65,62.2 81.65,55.175 78.025,51.55 36.9,51.55 36.9,0 144.2,0
GND_set on Top Layer "GND_SET_L01_P003" (solid, pour order 3): 36.9,52.5 77.7,52.5 80.7,55.5 80.7,62.2 78.9,64 72.2,64 72.2,77 144.2,77 144.2,127.2 36.9,127.2

## Silkscreen, mask and mechanical layers (free items; w line width, h text height)
Top Overlay:
  lines w0.254: 103.2,122 113.2,122 103.2,122 ; 103.2,122 123.2,122 123.2,112 103.2,112 103.2,122
  text "687281.099" at 62.203,123.775 h1
  text "687281.099" at 42.2,26.3 h1.52 r90